# Allegro board gumstix_expansion_v1_2.brd
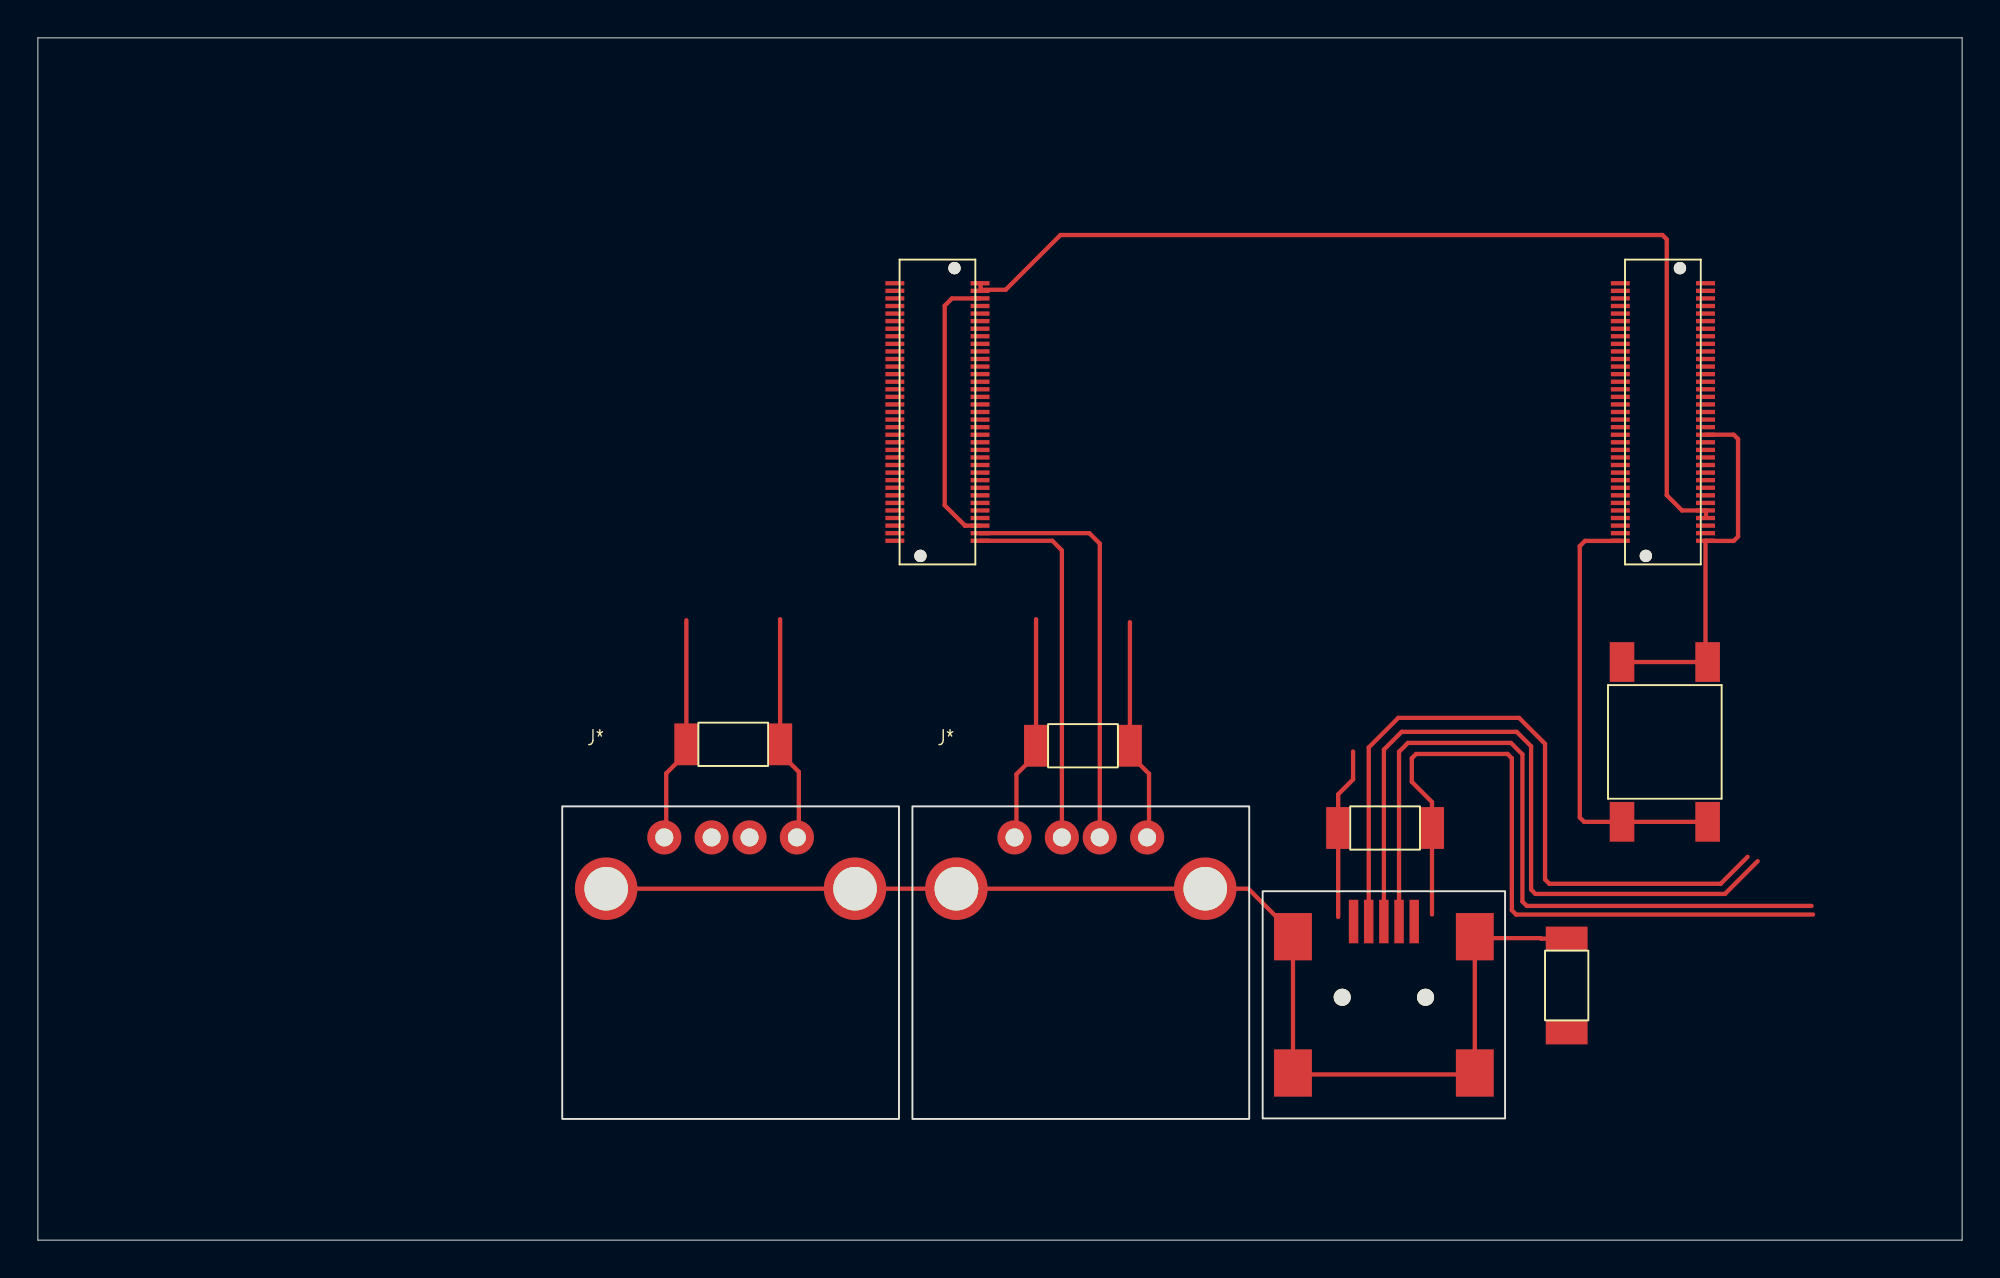
[diagram p0: board, top side]
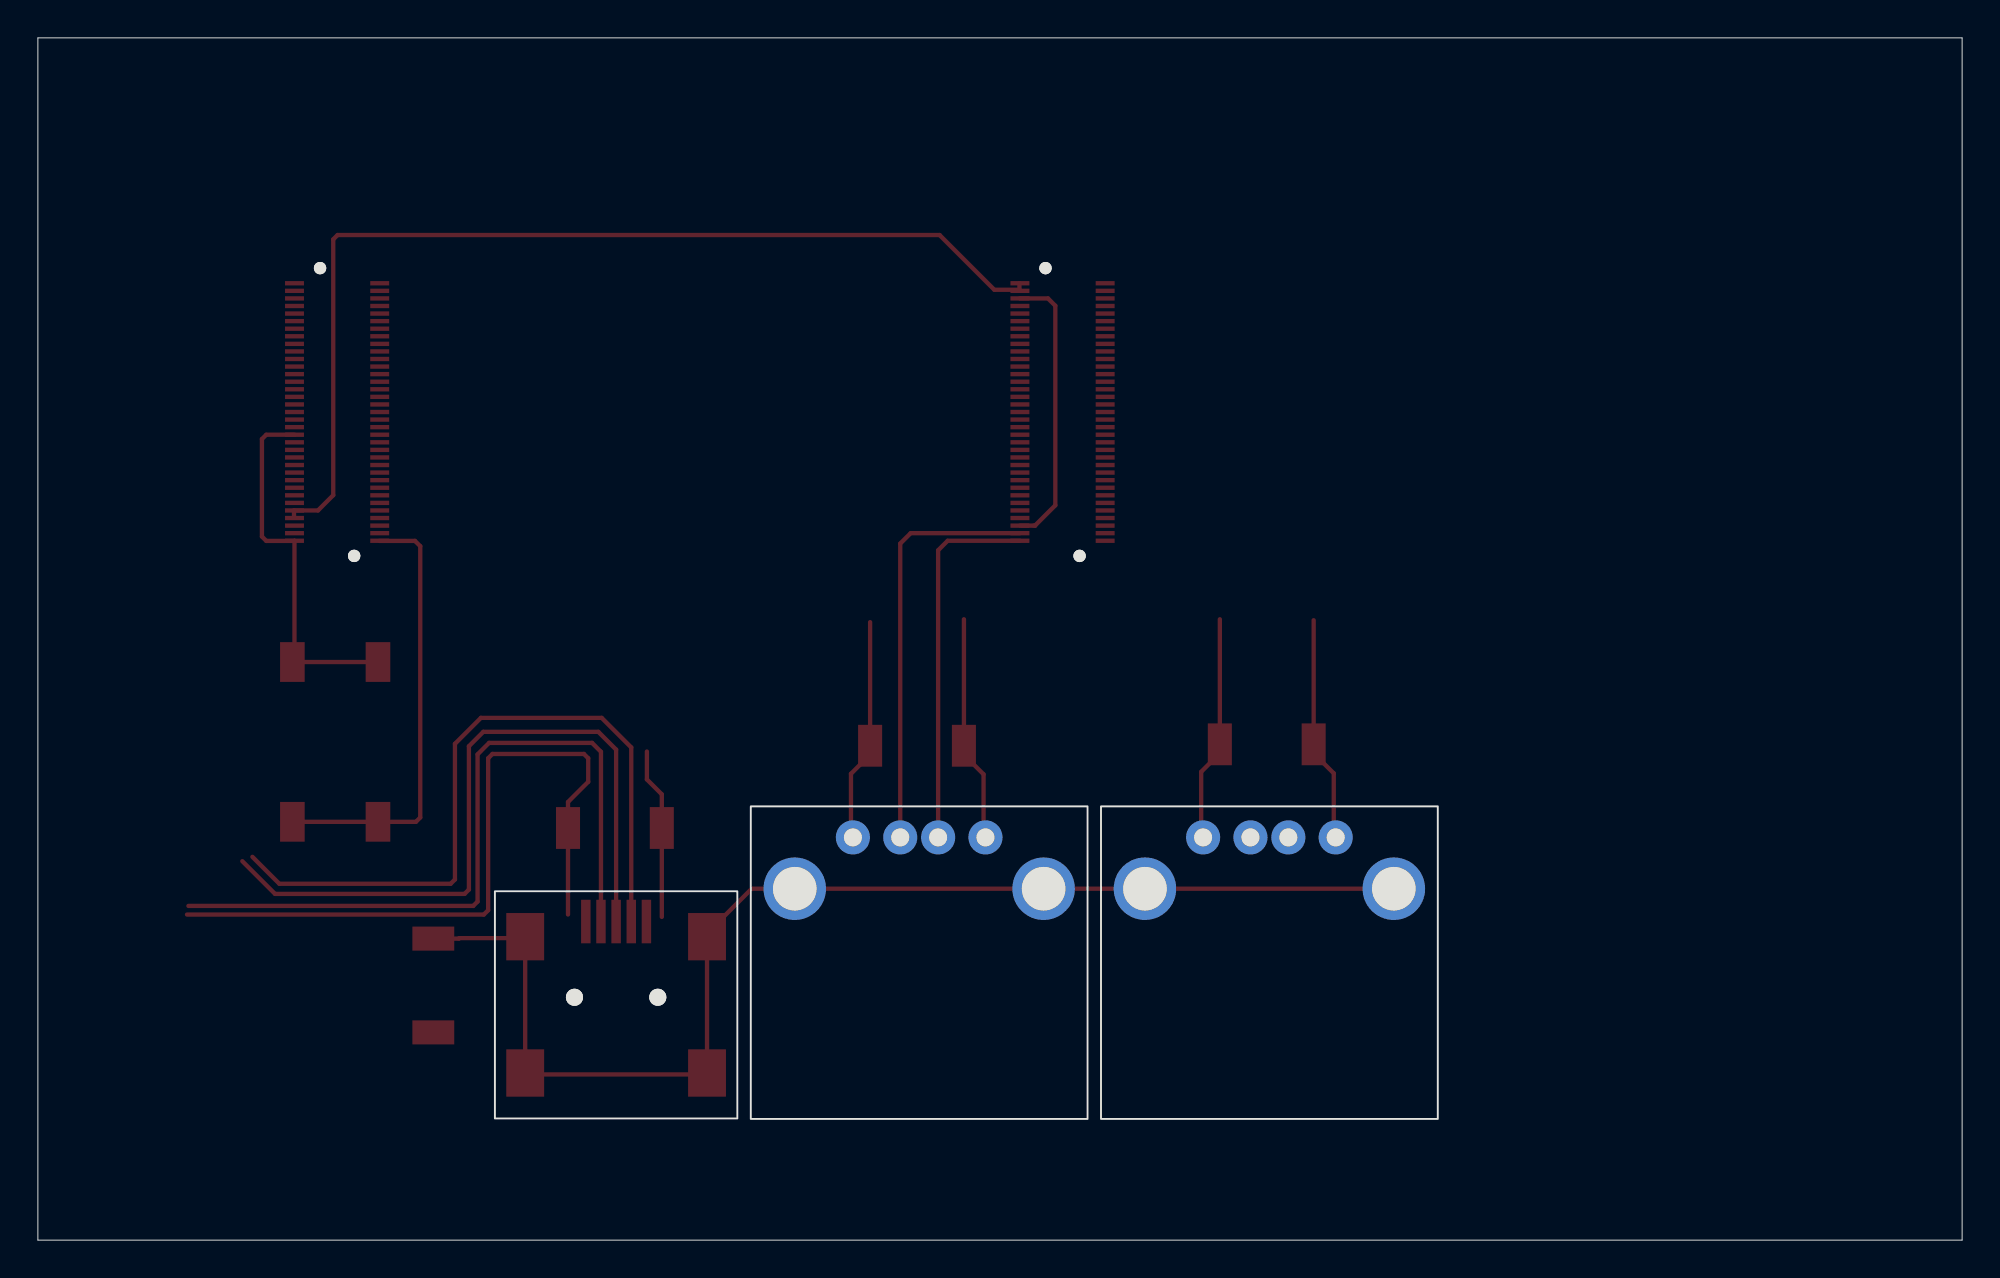
[diagram p1: board, bottom side, seen from below]

Outline 101.6 x 63.5 mm; copper layers: TOP, BOTTOM. Coordinates in mm from the lower left corner of the outline.
Outline path: 0,63.5 101.6,63.5 101.6,0 0,0 0,63.5

## Placement (name value [footprint] x y rotation side)
C1  4.7u  [SMDCAP]  36.65 26.19 180 top
C3  4.7u  [SMDCAP]  55.12 26.11 180 top
C5  4.7u  [SMDCAP]  71.2 21.77 0 top
C13  1n  [SMDCAP]  80.72 13.39 270 top
J1  GUMSTIX_J1  [GUMSTIX]  85.8 43.74 180 top
J2  GUMSTIX_J4  [GUMSTIX]  47.5 43.74 0 top
J4  CON6  [USBA]  55.07 14.02 0 top
J6  CON6  [USBA]  36.58 14.02 0 top
J12  CON9  [MUSBA_TSMT]  71.07 12.83 90 top
S1  -  [SWITCH]  85.9 26.31 270 top

## Library data of the parts
C1 C3 C5 = C_elect_0: Tolerance: ***; User Part Number: ***
C13 = C_elect_1: Tolerance: ***; User Part Number: ***
J1 = GUMSTIX_J1
J2 = GUMSTIX_J4
J4 J6 = CON6
J12 = CON9
S1 = SWITCH

## Footprints (pads in the part's own frame, mm; a bottom-side part is the same pattern mirrored in y, then rotated)
GUMSTIX
  round 0.65 hole 0.65 unplated: (-0.9,-7.6) (0.9,7.6)
  rect 1x0.23 smd: 1(2.25,6.8) 2(2.25,6.4) 3(2.25,6) 4(2.25,5.6) 5(2.25,5.2) 6(2.25,4.8) 7(2.25,4.4) 8(2.25,4) 9(2.25,3.6) 10(2.25,3.2) 11(2.25,2.8) 12(2.25,2.4) 13(2.25,2) 14(2.25,1.6) 15(2.25,1.2) 16(2.25,0.8) 17(2.25,0.4) 18(2.25,0) 19(2.25,-0.4) 20(2.25,-0.8) 21(2.25,-1.2) 22(2.25,-1.6) 23(2.25,-2) 24(2.25,-2.4) 25(2.25,-2.8) 26(2.25,-3.2) 27(2.25,-3.6) 28(2.25,-4) 29(2.25,-4.4) 30(2.25,-4.8) 31(2.25,-5.2) 32(2.25,-5.6) 33(2.25,-6) 34(2.25,-6.4) 35(2.25,-6.8) 36(-2.25,-6.8) 37(-2.25,-6.4) 38(-2.25,-6) 39(-2.25,-5.6) 40(-2.25,-5.2) 41(-2.25,-4.8) 42(-2.25,-4.4) 43(-2.25,-4) 44(-2.25,-3.6) 45(-2.25,-3.2) 46(-2.25,-2.8) 47(-2.25,-2.4) 48(-2.25,-2) 49(-2.25,-1.6) 50(-2.25,-1.2) 51(-2.25,-0.8) 52(-2.25,-0.4) 53(-2.25,0) 54(-2.25,0.4) 55(-2.25,0.8) 56(-2.25,1.2) 57(-2.25,1.6) 58(-2.25,2) 59(-2.25,2.4) 60(-2.25,2.8) 61(-2.25,3.2) 62(-2.25,3.6) 63(-2.25,4) 64(-2.25,4.4) 65(-2.25,4.8) 66(-2.25,5.2) 67(-2.25,5.6) 68(-2.25,6) 69(-2.25,6.4) 70(-2.25,6.8)
MUSBA_TSMT
  round 0.9 hole 0.9 unplated: (0,2.2) (0,-2.2)
  rect 2.3x0.5 smd: 1(4,1.6) 2(4,0.8) 3(4,0) 4(4,-0.8) 5(4,-1.6)
  rect 2.5x2 smd: 6(-4,4.8) 7(-4,-4.8) 8(3.2,-4.8) 9(3.2,4.8)
SMDCAP
  rect 1.27x2.21 smd: 1(-2.54,0) 2(2.413,0)
SWITCH
  rect 2.1x1.3 smd: 1(-4.22,2.26) 2(-4.22,-2.26) 3(4.22,-2.26) 4(4.22,2.26)
USBA
  round 3.3 hole 2.3 unplated: (-6.57,4.54) (6.57,4.54)
  round 1.8 hole 0.95: 1(-3.5,7.25) 2(-1,7.25) 3(1,7.25) 4(3.5,7.25)

## Nets
GND: C1.1(+) C3.1(+) C5.1(+) C13.2(-) J1.56(GND#56) J1.70(GND#70) J2.3(GND#3) J2.33(GND#33) J4.4 J6.4 J12.5 S1.1 S1.2
VCC_3.3: J1.66(VSYSTEM#66) J1.67(VSYSTEM#67) J2.1(VSYSTEM#1) J2.2(VSYSTEM#2)
COMMON_SHIELD: C13.1(+) J12.6 J12.7 J12.8 J12.9
GPIO18: J2.38(GPIO23_MMC3_DAT5)
GPIO19: J2.36(GPIO19_MMC3_D1)
GPIO20: J2.39(GPIO20_MMC3_D2)
GPIO21: J2.37(GPIO22_MMC3_DAT6)
GPIO165_IR_RXD3: J1.31(GPIO165_IR_RXD3)
GPIO166_IR_TXD3: J1.26(GPIO166_IR_TXD3)
SPI_CLOCK_1.8V: J2.43(GPIO171_SPI1_CLK)
SPI_CS_1.8V: J2.42(GPIO175_SPI1_CS1)
SPI_INTERRUPT_1.8V: J2.41(GPIO114_SPI1_NIRQ)
SPI_MISO_1.8V: J2.45(GPIO173_SPI1_MISO)
SPI_MOSI_1.8V: J2.44(GPIO172_SPI1_MOSI)
USB_OTG_DM: J1.37(USBOTG_DM) J12.2
USB_OTG_DP: J1.36(USBOTG_DP) J12.3
USB_OTG_ID: J1.46(USBOTG_ID) J12.4
USB_OTG_VBUS: C5.2(-) J1.54(USBOTG_VBUS) J12.1
USBH_DM: J2.35(USBH_DM) J4.2
USBH_DP: J2.34(USBH_DP) J4.3
USBH_VBUS: C1.2(-) C3.2(-) J2.32(USBH_VBUS) J4.1 J6.1
N03550: J1.1(NRESPWRON) S1.3 S1.4

Pads without a net: J1 2 3 4 5 6 7 8 9 10 11 12 13 14 15 16 17 18 19 20 21 22 23 24 25 27 28 29 30 32 33 34 35 38 39 40 41 42 43 44 45 47 48 49 50 51 52 53 55 57 58 59 60 61 62 63 64 65 68 69; J2 4 5 6 7 8 9 10 11 12 13 14 15 16 17 18 19 20 21 22 23 24 25 26 27 28 29 30 31 40 46 47 48 49 50 51 52 53 54 55 56 57 58 59 60 61 62 63 64 65 66 67 68 69 70; J6 2 3

## Routing (per net, layer and track width the routed paths; a pad name or vN(x,y) marks a point on that pad's centre or on a via; arc(x,y) is an arc through that point)
GND: length 67.6
  TOP w0.229: 57.66,32.64 C3.1 57.66,25.64 58.67,24.63 58.67,21.22 ; 39.19,32.79 C1.1 39.19,25.72 40.18,24.73 40.18,21.22 ; 48.95,37.74 48.95,37.74 J2.33 ; 48.95,37.74 47.88,38.81 47.88,49.35 48.27,49.74 J2.3 ; 48.95,37.74 49.02,37.74 ; 69.44,25.81 69.44,24.33 68.66,23.55 C5.1 68.66,17.07 ; J1.70 88.05,36.93 ; 88.05,36.93 88.05,30.65 S1.1 S1.2 ; 88.05,36.93 89.54,36.93 89.77,37.16 89.77,42.31 89.54,42.54 J1.56
VCC_3.3: length 54.1
  TOP w0.229: 88.08,38.2 88.08,38.54 J1.66 86.81,38.54 86,39.34 86,52.86 85.78,53.09 53.99,53.09 51.1,50.2 49.77,50.2 49.77,50.54
COMMON_SHIELD: length 66.4
  TOP w0.229: C13.1 79.38,15.93 79.35,15.95 75.87,15.95 J12.7 75.87,8.75 66.27,8.75 J12.6 J12.9 66.27,16.2 63.91,18.56 30.01,18.56
USB_OTG_DM: length 38.3
  TOP w0.229: 70.27,16.75 J12.2 70.27,26.02 71.83,27.58 78.21,27.58 79.58,26.21 79.58,19.05 79.81,18.82 88.85,18.82 90.27,20.24
USB_OTG_DP: length 38
  TOP w0.229: 90.81,20.02 89.08,18.29 79.07,18.29 78.84,18.52 78.84,26.09 78.08,26.85 72.01,26.85 71.07,25.91 J12.3 71.07,16.75
USB_OTG_ID: length 39.1
  TOP w0.229: 93.65,17.65 78.61,17.65 78.38,17.88 78.38,25.65 77.77,26.26 72.34,26.26 71.87,25.79 J12.4 71.87,16.75
USB_OTG_VBUS: length 38.2
  TOP w0.229: 93.73,17.2 78.05,17.2 77.83,17.42 77.83,25.45 77.6,25.68 72.77,25.68 72.54,25.45 72.54,24.21 73.61,23.14 C5.2 73.61,17.2
USBH_DM: length 19.7
  TOP w0.229: J4.2 54.07,36.43 53.56,36.94 J2.35
USBH_DP: length 22.1
  TOP w0.229: J4.3 56.07,36.79 55.52,37.34 J2.34
USBH_VBUS: length 24
  TOP w0.229: 34.24,32.74 C1.2 34.24,25.72 33.18,24.66 33.18,21.22 ; 51.67,21.22 51.67,24.6 52.7,25.64 C3.2 52.7,32.79
N03550: length 23.5
  TOP w0.229: 88.19,22.09 S1.4 S1.3 81.64,22.09 81.41,22.32 81.41,36.65 81.69,36.93 83.58,36.93
